# Altium PCB brс_pl_power_adapter.PcbDoc
Units mm, origin at the board's own origin, x right, y up, seen from the top; angles counter-clockwise.
Board outline 34 x 90.17 mm, 4 copper layers (Top Layer, Middle Layer, Plane Layer, Bottom Layer), stack 1.57 mm thick; 13 components, 15 nets, 142 pads, 71 vias.
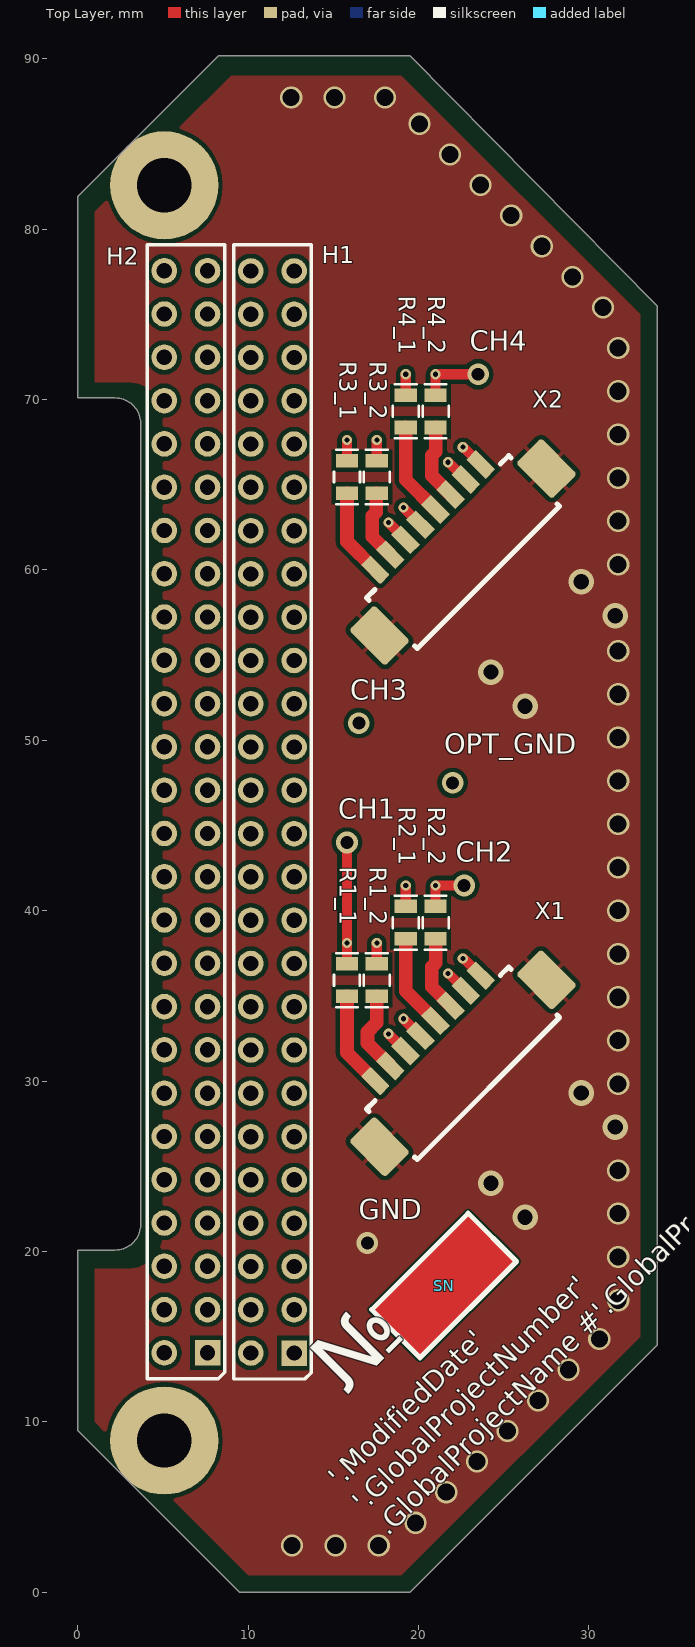
[diagram p0: Top Layer view]
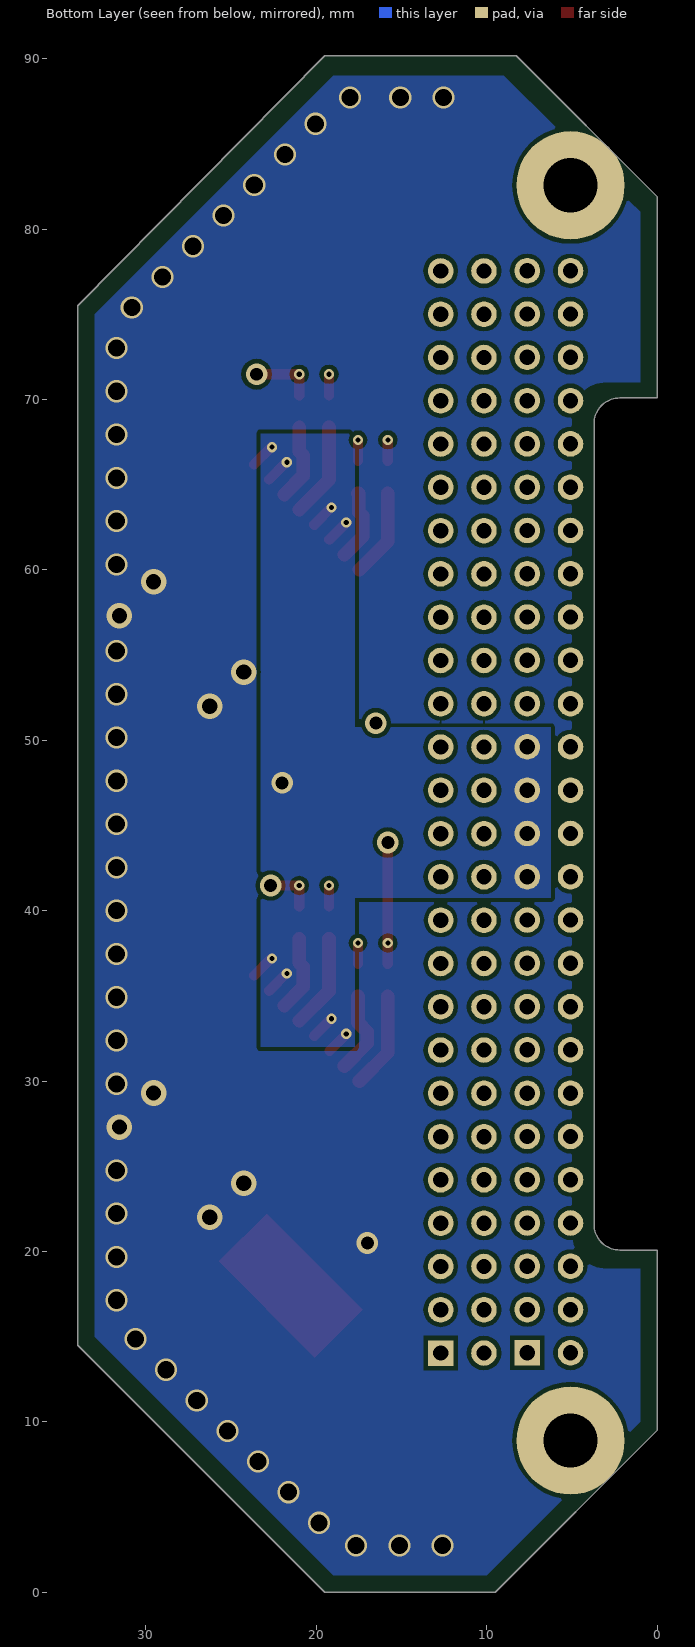
[diagram p1: Bottom Layer view, seen from below]
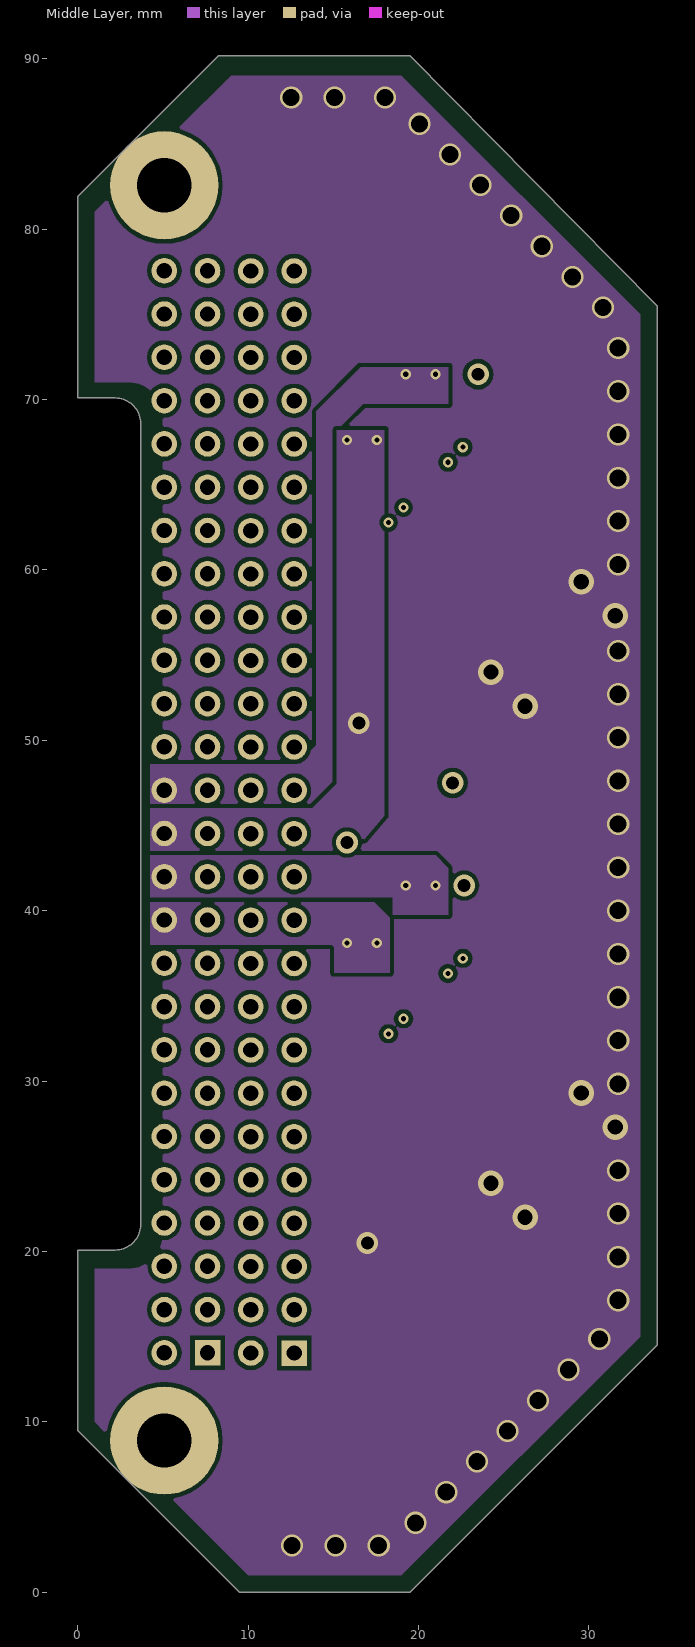
[diagram p2: Middle Layer]
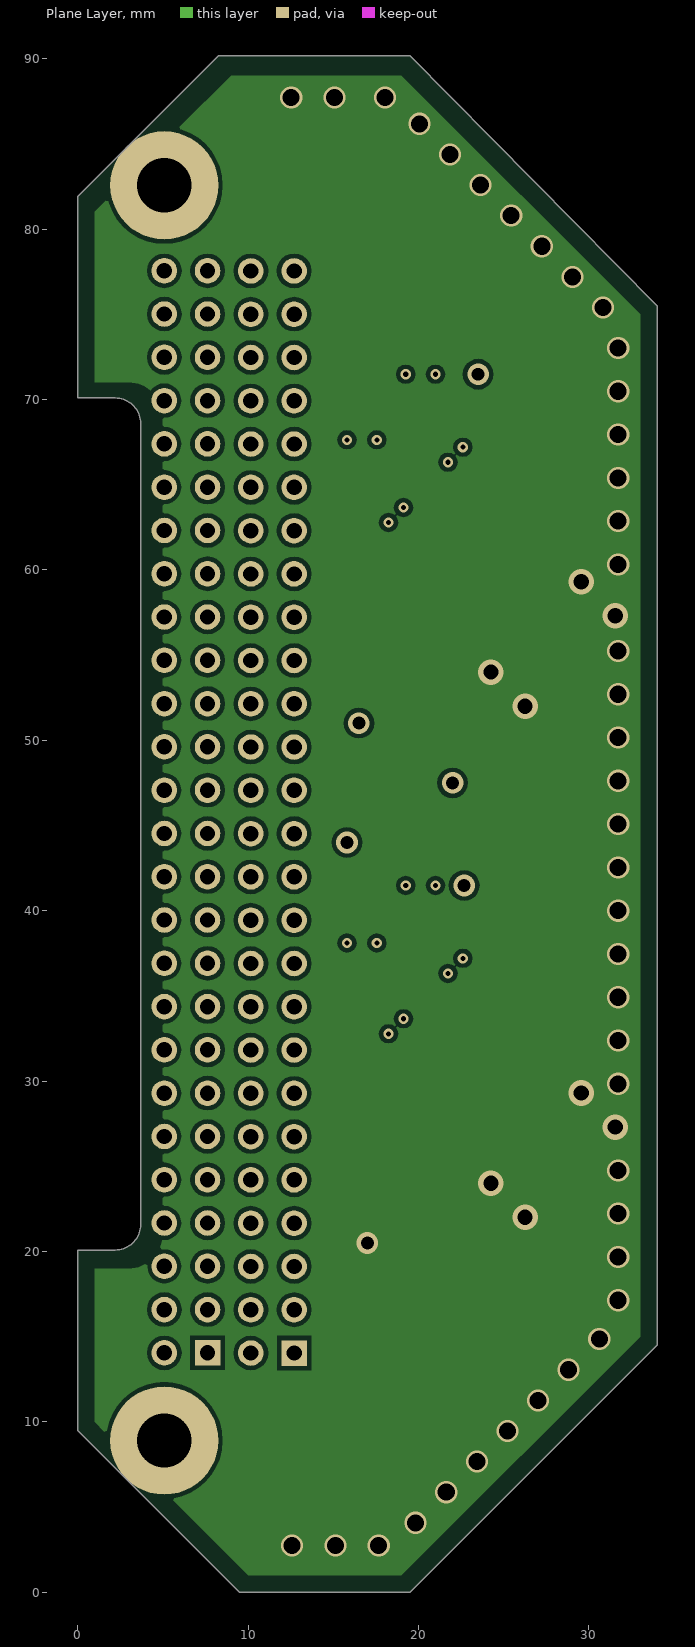
[diagram p3: Plane Layer]
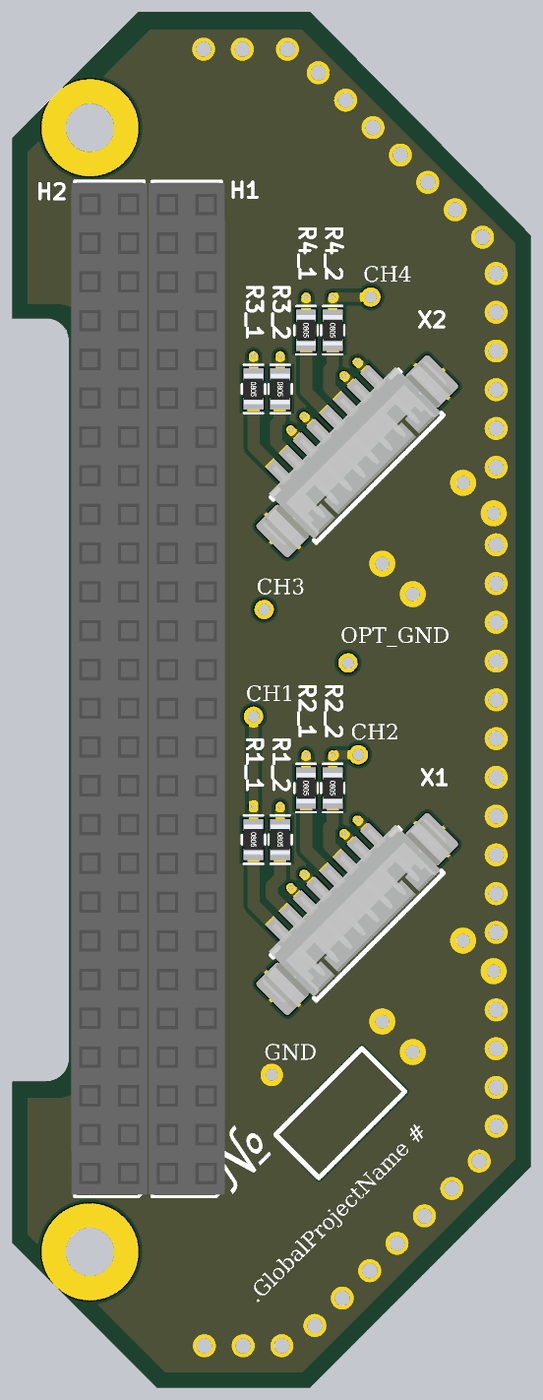
[diagram p4: 3D render of the assembled board from above, using the file's embedded part models]

## Layer stack, top to bottom
Top Solder: solder mask 0.01, Solder Resist, Dk 3.5
Top Layer: signal copper 0.035
Dielectric 2: prepreg 0.36, Dk 4.8
Middle Layer: signal copper 0.035
Dielectric 3: core 0.71, FR-4, Dk 4.1
Plane Layer: signal copper 0.035
Dielectric 1: prepreg 0.36, Dk 4.8
Bottom Layer: signal copper 0.035
Bottom Solder: solder mask 0.01, Solder Resist, Dk 3.5

## Board outline
0,9.5 0,20.085 2.2,20.085 ccw(c2.2,21.585) 3.7,21.585 3.7,68.585 ccw(c2.2,68.585) 2.2,70.085 0,70.085 0,81.9 8.27,90.17 19.5,90.17 34,75.5 34,14.5 19.5,0 9.5,0

## Design rules (kind name [scope] priority, off if disabled: settings)
Clearance [All] p1: gap=0.254 ignorepadtopadclearanceinfootprint=FALSE except(0: Arc-Hole Track-Hole SMDPad-Hole THPad-Hole Via-Hole Fill-Hole Poly-Hole Region-Hole Text-Hole)
ComponentClearance [InComponent('H1') vs InComponent('H2')] p1: gap=0 collisioncheckmode=3 verticalgap=0.254 showdistances=FALSE
PlaneConnect [InPadClass('All Pads')] p1: pad.planeconnectstyle=Relief pad.reliefexpansion=0.508 pad.reliefentries=4 pad.reliefconductorwidth=0.254 pad.reliefairgap=0.254 via.planeconnectstyle=Direct via.reliefexpansion=0.508 via.reliefentries=4 via.reliefconductorwidth=0.254 via.reliefairgap=0.254
PolygonConnect [All] p1: thpad.connectstyle=Direct thpad.reliefconductorwidth=0.254 thpad.reliefentries=4 thpad.polygonreliefangle="90 Angle" thpad.airgapwidth=0.254 smdpad.connectstyle=Relief smdpad.reliefconductorwidth=0.254 smdpad.reliefentries=4 smdpad.polygonreliefangle="90 Angle" smdpad.airgapwidth=0.254 via.connectstyle=Direct via.reliefconductorwidth=0.254 via.reliefentries=4 via.polygonreliefangle="90 Angle" via.airgapwidth=0.254
RoutingVias [All] p1: holewidth=0.711 width=1.27 viastyle="Through Hole" minholewidth=0.711 minwidth=1.27 maxholewidth=0.711 maxwidth=1.27
SolderMaskExpansion [All] p1: expansion=0.102 istentingtop=FALSE
Width [All] p1: maxlimit=2 minlimit=0.001 preferedwidth=0.4
28 further rules are at their usual default settings.

## Components (designator, comment, footprint, x,y, rotation, side; value= is the part's Value field where it differs from the comment)
H1 "ESQ-126-39-G-D" ESQ-126-39-G-D 12.7,14.04 r90 top locked
H2 "ESQ-126-39-G-D" ESQ-126-39-G-D 7.62,14.05 r90 top locked
R1_1 "OSM R1-12" SMD_0805 15.802,36.873 r270 top value=0
R1_2 "OSM R1-12" SMD_0805 17.552,36.873 r270 top value=0
R2_1 "OSM R1-12" SMD_0805 19.25,40.25 r270 top value=0
R2_2 "OSM R1-12" SMD_0805 21,40.25 r270 top value=0
R3_1 "OSM R1-12" SMD_0805 15.802,66.4 r270 top value=0
R3_2 "OSM R1-12" SMD_0805 17.552,66.4 r270 top value=0
R4_1 "OSM R1-12" SMD_0805 19.25,70.25 r270 top value=0
R4_2 "OSM R1-12" SMD_0805 21,70.25 r270 top value=0
SN "Место под нанесение серийного номера" Serial_number_v3 21.5,18 r45 top
X1 "MOLEX-PB-8" MOLEX-PB-8-R 17.5,30 r45 top
X2 "MOLEX-PB-8" MOLEX-PB-8-R 17.5,60 r45 top locked

## Footprints (in the part's own frame and the unit in brackets; to place one, negate y for a bottom-side part, rotate by r counter-clockwise, add the part's x,y. Pads: shape width x height; smd on the part's side, far side on the other; paste and mask are expansions set on the pad)
ESQ-126-39-G-D [mm] ".100\" PC/10 Elevated Socket Strip"
  rect 1.5x1.5 hole 0.9: 1(0,0)
  round 1.5 hole 0.9: 2(0,2.54) 3(2.54,0) 4(2.54,2.54) 5(5.08,0) 6(5.08,2.54) 7(7.62,0) 8(7.62,2.54) 9(10.16,0) 10(10.16,2.54) 11(12.7,0) 12(12.7,2.54) 13(15.24,0) 14(15.24,2.54) 15(17.78,0) 16(17.78,2.54) 17(20.32,0) 18(20.32,2.54) 19(22.86,0) 20(22.86,2.54) 21(25.4,0) 22(25.4,2.54) 23(27.94,0) 24(27.94,2.54) 25(30.48,0) 26(30.48,2.54) 27(33.02,0) 28(33.02,2.54) 29(35.56,0) 30(35.56,2.54) 31(38.1,0) 32(38.1,2.54) 33(40.64,0) 34(40.64,2.54) 35(43.18,0) 36(43.18,2.54) 37(45.72,0) 38(45.72,2.54) 39(48.26,0) 40(48.26,2.54) 41(50.8,0) 42(50.8,2.54) 43(53.34,0) 44(53.34,2.54) 45(55.88,0) 46(55.88,2.54) 47(58.42,0) 48(58.42,2.54) 49(60.96,0) 50(60.96,2.54) 51(63.5,0) 52(63.5,2.54)
  silkscreen extent -1.53,-1 65.02,3.54, body extent -1.39,-1.22 64.9,3.78, height 11.2
MOLEX-PB-8-R [mm]
  rrect20% 0.8x1.6 smd: 1(-0.025,0.025)
  rect 0.8x1.6 smd: 2(1.225,0.025) 3(2.475,0.025) 4(3.725,0.025) 5(4.975,0.025) 6(6.225,0.025) 7(7.475,0.025) 8(8.725,0.025)
  rrect20% 2.1x3 smd: MP(-2.575,-2.875) MP(11.275,-2.875)
  silkscreen extent -1.55,-4.97 10.25,-0.77, body extent -3.2,-4.72 11.95,0.49, height 3.4
Serial_number_v3 [mm]
  Top Layer region: -4,-2 4,-2 4,2 -4,2
  silkscreen extent -4,-2 4,2
SMD_0805 [mm]
  rect 0.8x1.3 smd: 1(0,0) 2(1.9,0)
  silkscreen extent -0.64,-0.76 2.54,0.76, body extent -0.05,-0.62 1.95,0.63, height 0.43

## Part data
H1 H2: "Elevated socket, dual-row, 26-pin per row", ComponentLink1Description=DataSheet, ComponentLink1URL=https://static.chipdip.ru/lib/071/DOC025071643.pdf, Назначение="Сквозной разъем, двойно, 52 контакта, шаг 2,54 мм", Наименование=ESQ-126-39-G-D, Потребление, Вт=0,00
R1_1 R1_2 R2_1 R2_2 R3_1 R3_2 R4_1 R4_2: library part Resistor, "Resistor", Назначение=SMD-резистор, Наименование="ОСМ Р1-12", Потребление, Вт=0,001, Точность=%
  R1_1 R1_2 R2_1 R2_2: ClassName=Group1
  R3_1 R3_2 R4_1 R4_2: ClassName=Group2
SN: library part Serial_number, Назначение="Место под нанесение серийного номера", Наименование="Место под нанесение серийного номера", Потребление, Вт=0
X1 X2: "MOLEX PicoBlade 8-pin", Назначение="MOLEX PicoBlade 8-pin to board", Наименование=MOLEX-PB-8-R, Потребление, Вт=0,001
  X1: ClassName=Group1
  X2: ClassName=Group2

## Free pads (board coordinates)
  round 6.35 hole 3.18: 1(5.08,8.905) 1(5.08,82.565)

## Via types
v1: diameter 1.3, hole 1, Top Layer to Bottom Layer, 41 vias
v2: diameter 0.6, hole 0.3, Top Layer to Bottom Layer, 16 vias
v3: diameter 1.5, hole 0.9, Top Layer to Bottom Layer, 8 vias
v4: diameter 1.27, hole 0.762, Top Layer to Bottom Layer, 6 vias

## Nets (pads, with @x,y where several pads share a name; then routed paths per layer and width w, separated by ;. In a path a pad name is that pad's centre, name@x,y a point inside that pad or via, vN(x,y) a via of type N, cw(c..) or ccw(c..) an arc to the next point about the centre after c; other vN are vias at no path point)
GND: X1.MP X2.MP
  other v1: 12.584,2.752 15.124,2.752 17.664,2.752 19.83,4.078 21.626,5.874 23.422,7.67 25.218,9.466 27.014,11.262 28.811,13.058 30.607,14.855 31.718,17.139 31.718,19.679 31.718,22.219 31.718,24.759 31.718,29.839 31.718,32.379 31.718,34.919 31.718,37.459 31.718,39.999 31.718,42.539 31.718,45.079 31.718,47.619 31.718,50.159 31.718,52.699 31.718,55.239 31.718,60.319 31.718,62.859 31.718,65.399 31.718,67.939 31.718,70.479 31.718,73.019 30.825,75.397 29.029,77.193 27.233,78.989 25.437,80.785 23.641,82.581 21.845,84.377 20.049,86.173 12.529,87.718 15.069,87.718 18.03,87.714
  other v3: 26.25,22 24.25,24 31.55,27.3 29.55,29.3 26.25,52 24.25,54 31.55,57.3 29.55,59.3
  other v4: 17,20.5
NetR1_1_2: R1_1.2 X1.1 | length 5.7
  Top Layer w0.8: R1_1.2 15.802,31.663 X1.1
NetR1_2_2: R1_2.2 X1.2 | length 4.9
  Top Layer w0.8: R1_2.2 17.552,33.43 17.009,32.886 17.009,32.224 X1.2
NetR2_1_2: R2_1.2 X1.5 | length 5.5
  Top Layer w0.4: X1.5@20.996,33.536 X1.5
  Top Layer w0.8: R2_1.2 19.25,35.286 X1.5
NetR2_2_2: R2_2.2 X1.6 | length 4.5
  Top Layer w0.8: R2_2.2 21,36.935 20.774,36.709 20.774,35.529 X1.6
NetR3_1_2: R3_1.2 X2.1 | length 5.2
  Top Layer w0.4: X2.1 X2.1@17.465,60.018
  Top Layer w0.8: R3_1.2 15.802,61.663 X2.1
NetR3_2_2: R3_2.2 X2.2 | length 4.2
  Top Layer w0.8: R3_2.2 17.514,64.5 17.514,63.391 17.289,63.167 17.289,61.944 X2.2
NetR4_1_2: R4_1.2 X2.5 | length 5.5
  Top Layer w0.4: X2.5@20.997,63.536 X2.5
  Top Layer w0.8: R4_1.2 19.25,65.286 X2.5
NetR4_2_2: R4_2.2 X2.6 | length 4.5
  Top Layer w0.4: X2.6@21.875,64.419 X2.6
  Top Layer w0.8: R4_2.2 21,66.935 20.775,66.709 20.775,65.529 X2.6
OPT_GND: H2.23 H2.25 H2.27 H2.29 X1.3 X1.4 X1.7 X1.8 X2.3 X2.4 X2.7 X2.8 | length 11.5
  Top Layer w0.4: v2@18.243,62.764 v2(18.243,62.771) ; X2.3 X2.3@19.232,61.775
  Top Layer w0.6: v2(18.243,32.771) 18.243,32.757 X1.3 ; v2@18.243,62.764 X2.3@19.232,61.775 ; v2(19.114,33.657) 19.114,33.654 X1.4 ; v2(19.114,63.657) 20.116,62.655 X2.4 ; v2(21.728,36.314) 21.757,36.314 X1.7 ; v2(21.729,66.314) 21.757,66.314 X2.7 ; v2(22.6,37.2) 22.639,37.2 X1.8 ; v2(22.6,67.2) 22.639,67.2 X2.8
  other v4: 22,47.5
PL_POWER_CH1: H2.22 R1_1.1 R1_2.1 | length 8.4
  Top Layer w0.6: R1_1.1 v2(15.802,38.1) v4(15.802,44) ; R1_2.1 v2(17.552,38.1)
PL_POWER_CH2: H2.24 R2_1.1 R2_2.1 | length 4.1
  Top Layer w0.6: R2_1.1 v2(19.25,41.477) ; R2_2.1 v2(21,41.477) v4@22.681,41.477
  other v4: 22.682,41.477
PL_POWER_CH3: H2.26 R3_1.1 R3_2.1 | length 2.5
  Top Layer w0.6: R3_1.1 v2(15.802,67.627) ; R3_2.1 v2(17.552,67.627)
  other v4: 16.5,51
PL_POWER_CH4: H2.28 R4_1.1 R4_2.1 | length 5
  Top Layer w0.6: R4_1.1 v2(19.25,71.477) ; R4_2.1 v2(21,71.477) v4@23.5,71.477
  other v4: 23.5,71.477
TempNet: 
pads on no net: H1.1 H1.2 H1.3 H1.4 H1.5 H1.6 H1.7 H1.8 H1.9 H1.10 H1.11 H1.12 H1.13 H1.14 H1.15 H1.16 H1.17 H1.18 H1.19 H1.20 H1.21 H1.22 H1.23 H1.24 H1.25 H1.26 H1.27 H1.28 H1.29 H1.30 H1.31 H1.32 H1.33 H1.34 H1.35 H1.36 H1.37 H1.38 H1.39 H1.40 H1.41 H1.42 H1.43 H1.44 H1.45 H1.46 H1.47 H1.48 H1.49 H1.50 H1.51 H1.52 H2.1 H2.2 H2.3 H2.4 H2.5 H2.6 H2.7 H2.8 H2.9 H2.10 H2.11 H2.12 H2.13 H2.14 H2.15 H2.16 H2.17 H2.18 H2.19 H2.20 H2.21 H2.30 H2.31 H2.32 H2.33 H2.34 H2.35 H2.36 H2.37 H2.38 H2.39 H2.40 H2.41 H2.42 H2.43 H2.44 H2.45 H2.46 H2.47 H2.48 H2.49 H2.50 H2.51 H2.52

## Polygon pours and split planes (outlines as drawn)
GND on Bottom Layer "Bottom Layer-GND" (solid, pour order 34): 10,1 19,1 33,15 33,75 19,89 9,89 1,81 1,71 3,71 cw(c3,69) 5,69 5,21 cw(c3,21) 3,19 1,19 1,10
OPT_GND on Bottom Layer "Bottom Layer-OPT_GND" (solid, pour order 15): 17.75,32 23.25,32 23.25,68 17.75,68 17.75,50.75 6.25,50.75 6.25,40.75 17.75,40.75
GND on Middle Layer "Middle Layer-GND" (solid, pour order 35): 10,1 19,1 33,15 33,75 19,89 9,89 1,81 1,71 3,71 cw(c3,69) 5,69 5,21 cw(c3,21) 3,19 1,19 1,10
PL_POWER_CH1 on Middle Layer "PL_POWER_CH1_L02_P024" (solid, pour order 24): 4.25,40.5 17.4,40.5 18.304,39.596 18.304,36.367 15.045,36.367 15.045,37.855 14.9,38 4.25,38
PL_POWER_CH2 on Middle Layer "PL_POWER_CH2_L02_P017" (solid, pour order 17): 4.25,40.8 18.5,40.75 18.5,39.75 21.75,39.75 21.75,42.5 21,43.25 4.25,43.25
PL_POWER_CH4 on Middle Layer "PL_POWER_CH4_L02_P020" (solid, pour order 20): 4.25,46 13.75,46 15.2,47.45 15.2,68.2 16.754,69.754 21.755,69.754 21.755,71.9 16.6,71.9 14,69.3 14,49.7 12.9,48.6 4.25,48.6
PL_POWER_CH3 on Middle Layer "PL_POWER_CH3_L02_P018" (solid, pour order 18): 4.25,43.5 16.214,43.5 18,45.583 18,68.2 15.2,68.2 15.2,47.45 13.75,46 4.25,46
GND on Top Layer "Top Layer-GND" (solid, pour order 33): 10,1 19,1 33,15 33,75 19,89 9,89 1,81 1,71 3,71 cw(c3,69) 5,69 5,21 cw(c3,21) 3,19 1,19 1,10
GND on Plane Layer "Top Layer-GND" (solid, pour order 36): 10,1 19,1 33,15 33,75 19,89 9,89 1,81 1,71 3,71 cw(c3,69) 5,69 5,21 cw(c3,21) 3,19 1,19 1,10

## Silkscreen, mask and mechanical layers (free items; w line width, h text height)
Top Overlay:
  text "CH4" at 23,72.477 h2
  text "CH3" at 16,52 h2
  text "OPT_GND" at 21.5,48.815 h2
  text "CH1" at 15.302,45 h2
  text "CH2" at 22.182,42.477 h2
  text "GND" at 16.5,21.5 h2
  text "'.ModifiedDate' / '.GlobalProjectNumber' / .GlobalProjectName #'.GlobalProjectRevision'" at 18.5,3 h2 r45
Mechanical 1:
  lines w0.3: 0,9.5 0,20.085 2.2,20.085 ccw(c2.2,21.585) 3.7,21.585 3.7,68.585 ccw(c2.2,68.585) 2.2,70.085 0,70.085 0,81.9 8.27,90.17 19.5,90.17 34,75.5 34,14.5 19.5,0 9.845,0 9.5,0 0,9.5

## Text inside footprints (layer, text, board x,y; h text height)
SN: Top Overlay "№" at 16.621,10.717 h6 r45